# EAGLE board communication board (EAGLE 7.5.0)
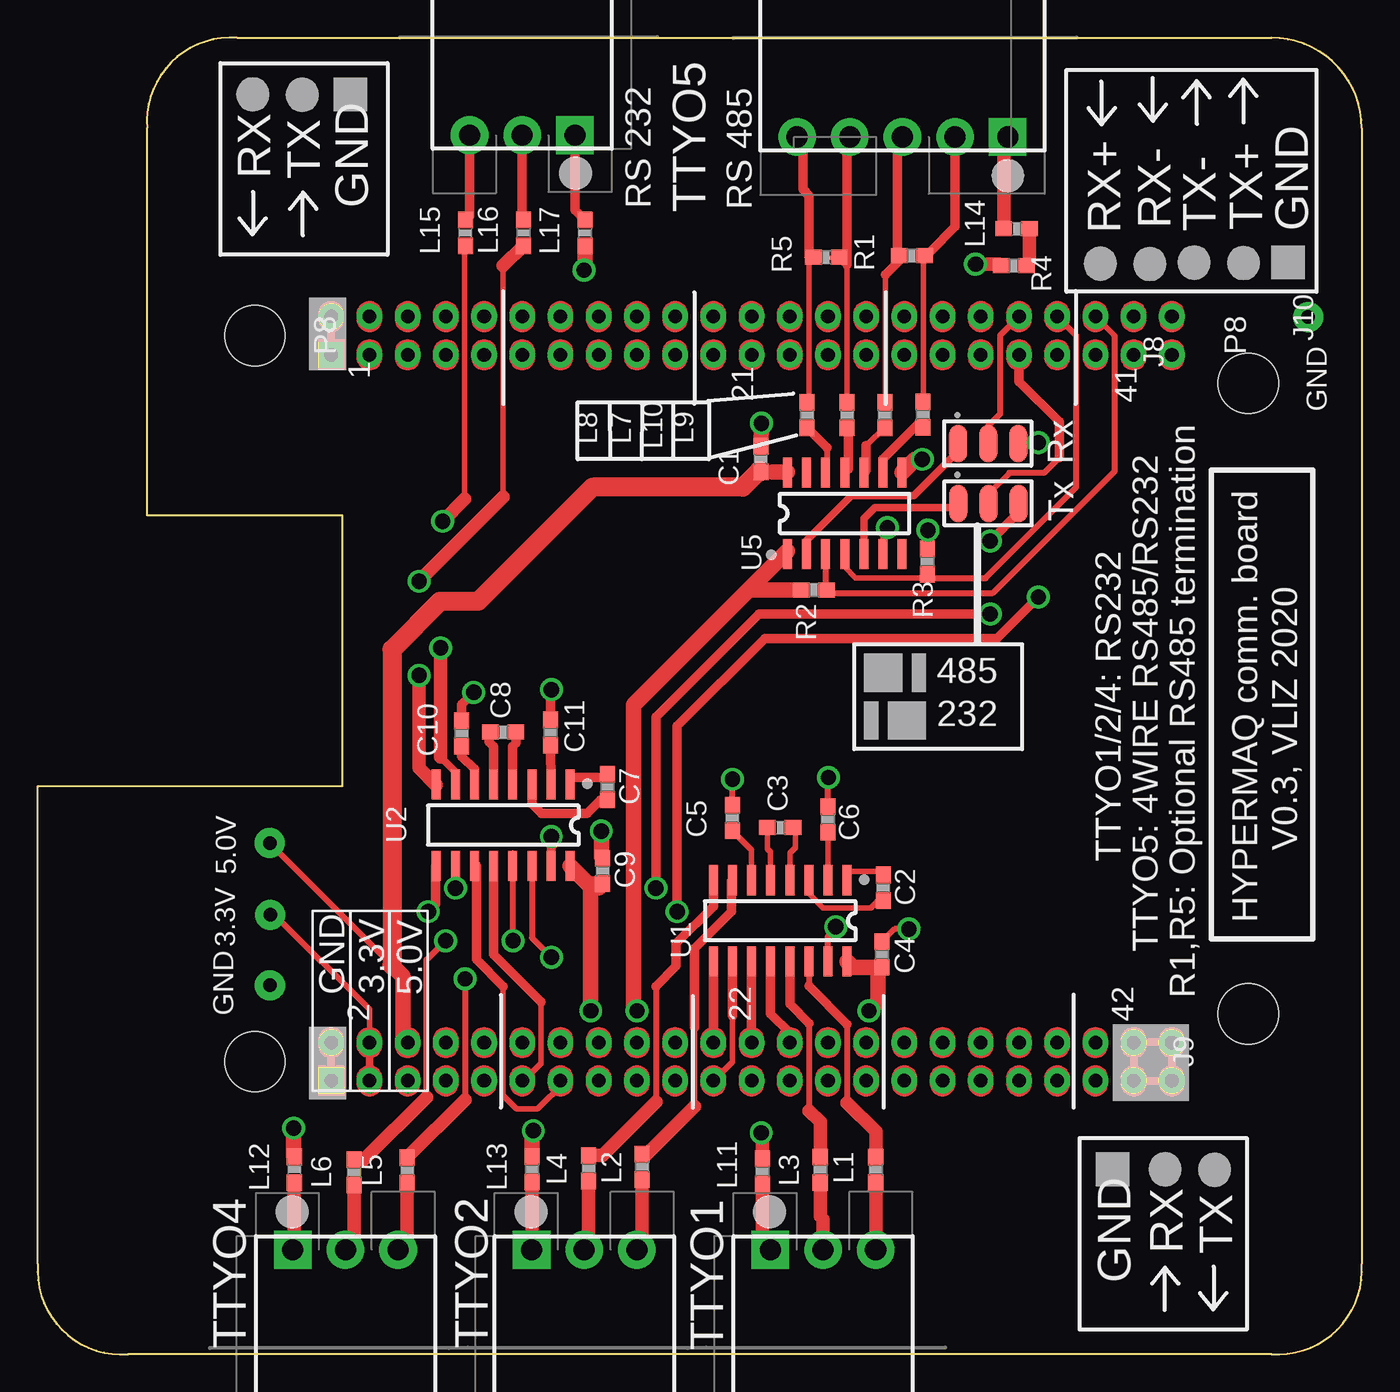
[diagram p0: board, top side]
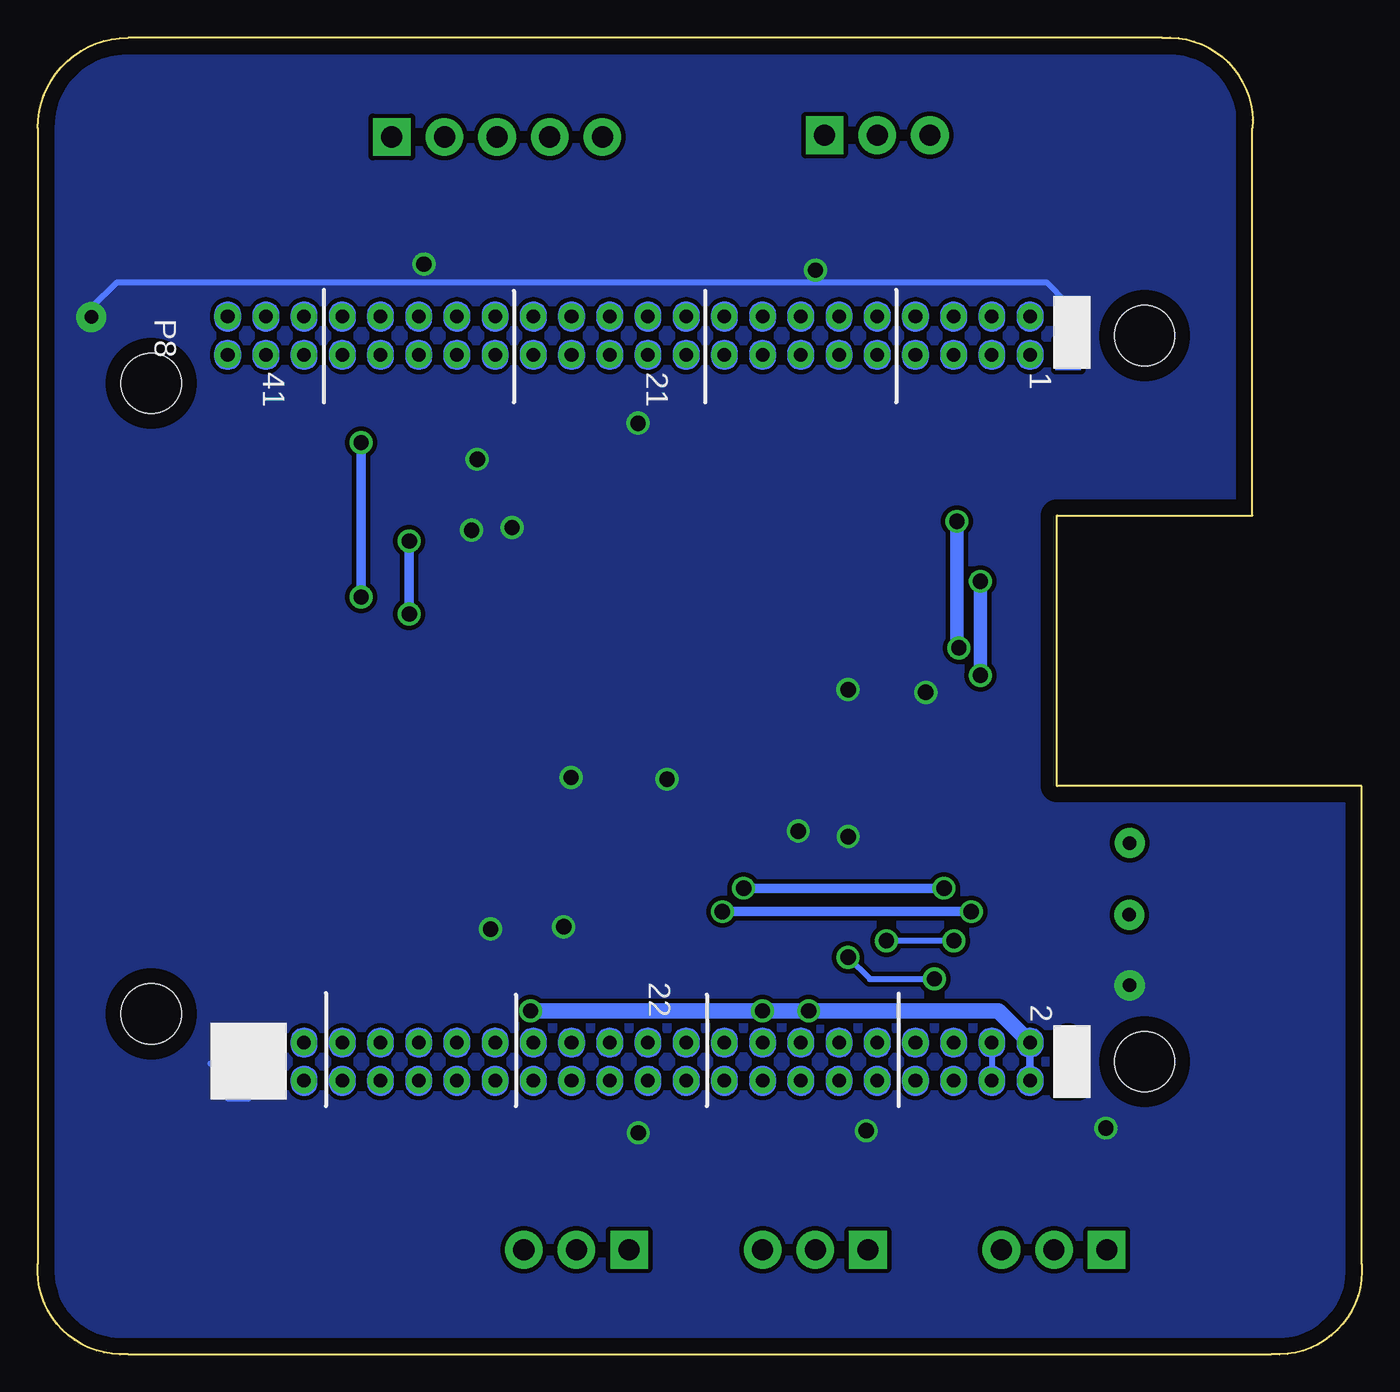
[diagram p1: board, bottom side, seen from below]

Size 88.03 x 87.53 mm. Coordinates in mm from the lower left corner, seen from the top.
Outline: 13.27,87.52 arc99 7.27,81.52 7.27,55.77 20.27,55.77 20.27,37.77 0.02,37.77 0.02,6.02 arc100 6.02,0.02 82.02,0.02 arc99 88.02,6.02 88.02,81.52 arc90 82.02,87.52 13.27,87.52
Copper layers (1*16): Top 0.035mm / dielectric 1.5mm / Bottom 0.035mm
Design rules "default *": minimum track width 10mil, minimum drill 0.61mm, track to track 8mil, track to pad 8mil, pad to pad 8mil, via to via 8mil, smd to smd 8mil, copper to edge 40mil, drill to drill 8mil, minimum pad ring 0mil, minimum via ring 8mil, stop-mask expansion 4mil, vias tented up to drill 40mil, thermal gap 10mil
Net classes: 0 Default: width 0.4 mm, clearance 0.254 mm, clearance 0.254 mm to class 1; 1 Signals: width 0.4 mm, clearance 0.254 mm, clearance 0.254 mm to class 0
Holes 4 mm at 14.44,67.72 80.48,64.54 80.48,22.63 14.44,19.46
bRestrict: 8 lines

## Footprints (pad centres in the part's own frame; a part is rotated, then mirrored left to right if it is on the bottom)
0603 = smd 1.1 x 1: 1 -0.85,0; 2 0.85,0
0603_C3 = smd 1.1 x 1: 1 -0.85,0; 2 0.85,0
Solder_spot/pin_header_small_no_marking = drill 0.9 pad 2: 1 0.007,-0.017
Weidmuller_SL_3.5/5/90G_ORANGE_5P = drill 1.4 pad 2.5 square: 1 7,0 | drill 1.4 pad 2.5: 2 3.5,0; 3 0,0; 4 -3.5,0; 5 -7,0
Weidmuller_SL_3.5/3/90G_ORANGE_3P = drill 1.4 pad 2.5 square: 1 3.5,0 | drill 1.4 pad 2.5: 2 0,0; 3 -3.5,0
BBB_P8_Samtec_ESQ-123-14-G-D = drill 0.9 pad 1.7 square: 1 0,0 | drill 0.9 pad 1.7: 2 0,2.54; 3 2.54,0; 4 2.54,2.54; 5 5.08,0; 6 5.08,2.54; 7 7.62,0; 8 7.62,2.54; 9 10.16,0; 10 10.16,2.54; 11 12.7,0; 12 12.7,2.54; 13 15.24,0; 14 15.24,2.54; 15 17.78,0; 16 17.78,2.54; 17 20.32,0; 18 20.32,2.54; 19 22.86,0; 20 22.86,2.54; 21 25.4,0; 22 25.4,2.54; 23 27.94,0; 24 27.94,2.54; 25 30.48,0; 26 30.48,2.54; 27 33.02,0; 28 33.02,2.54; 29 35.56,0; 30 35.56,2.54; 31 38.1,0; 32 38.1,2.54; 33 40.64,0; 34 40.64,2.54; 35 43.18,0; 36 43.18,2.54; 37 45.72,0; 38 45.72,2.54; 39 48.26,0; 40 48.26,2.54; 41 50.8,0; 42 50.8,2.54; 43 53.34,0; 44 53.34,2.54; 45 55.88,0; 46 55.88,2.54
BBB_P9_Samtec_ESQ-123-14-G-D = drill 0.9 pad 1.7 square: 101 0,0 | drill 0.9 pad 1.7: 102 0,2.54; 103 2.54,0; 104 2.54,2.54; 105 5.08,0; 106 5.08,2.54; 107 7.62,0; 108 7.62,2.54; 109 10.16,0; 110 10.16,2.54; 111 12.7,0; 112 12.7,2.54; 113 15.24,0; 114 15.24,2.54; 115 17.78,0; 116 17.78,2.54; 117 20.32,0; 118 20.32,2.54; 119 22.86,0; 120 22.86,2.54; 121 25.4,0; 122 25.4,2.54; 123 27.94,0; 124 27.94,2.54; 125 30.48,0; 126 30.48,2.54; 127 33.02,0; 128 33.02,2.54; 129 35.56,0; 130 35.56,2.54; 131 38.1,0; 132 38.1,2.54; 133 40.64,0; 134 40.64,2.54; 135 43.18,0; 136 43.18,2.54; 137 45.72,0; 138 45.72,2.54; 139 48.26,0; 140 48.26,2.54; 141 50.8,0; 142 50.8,2.54; 143 53.34,0; 144 53.34,2.54; 145 55.88,0; 146 55.88,2.54
SOIC-16/150mil = smd 2 x 0.6: 1 -2.7,4.445; 2 -2.7,3.175; 3 -2.7,1.905; 4 -2.7,0.635; 5 -2.7,-0.635; 6 -2.7,-1.905; 7 -2.7,-3.175; 8 -2.7,-4.445; 9 2.7,-4.445; 10 2.7,-3.175; 11 2.7,-1.905; 12 2.7,-0.635; 13 2.7,0.635; 14 2.7,1.905; 15 2.7,3.175; 16 2.7,4.445
Solder_Jumper_3P = smd 1.2 x 2.5: 1 -2,0; 2 0,0; 3 2,0
SOIC-14/150mil = smd 2 x 0.6: 1 -2.7,3.81; 2 -2.7,2.54; 3 -2.7,1.27; 4 -2.7,0; 5 -2.7,-1.27; 6 -2.7,-2.54; 7 -2.7,-3.81; 8 2.7,-3.81; 9 2.7,-2.54; 10 2.7,-1.27; 11 2.7,0; 12 2.7,1.27; 13 2.7,2.54; 14 2.7,3.81

## Placement (x,y rotation side)
C1  220nF_25V_10%  [0603]  48.08,59.51 90 top
C2  220nF_25V_10%  [0603]  56.22,31.02 90 top
C3  220nF_25V_10%  [0603_C3]  49.36,35.02 180 top
C4  220nF_25V_10%  [0603]  56.13,26.58 270 top
C5  220nF_25V_10%  [0603]  46.19,35.65 90 top
C6  220nF_25V_10%  [0603]  52.54,35.56 90 top
C7  220nF_25V_10%  [0603]  37.89,37.72 90 top
C8  220nF_25V_10%  [0603_C3]  30.95,41.37 180 top
C9  220nF_25V_10%  [0603]  37.57,32.13 270 top
C10  220nF_25V_10%  [0603]  28.2,41.28 90 top
C11  220nF_25V_10%  [0603]  34.1,41.34 90 top
J1  GND  [Solder_spot/pin_header_small_no_marking]  15.45,24.52 180 top
J2  3.3V  [Solder_spot/pin_header_small_no_marking]  15.48,29.21 180 top
J3  1x5 Horizontal  [Weidmuller_SL_3.5/5/90G_ORANGE_5P]  57.49,80.93 0 top
J4  1x3 Horizontal  [Weidmuller_SL_3.5/3/90G_ORANGE_3P]  52.21,6.95 180 top
J5  1x3 Horizontal  [Weidmuller_SL_3.5/3/90G_ORANGE_3P]  36.34,6.95 180 top
J6  1x3 Horizontal  [Weidmuller_SL_3.5/3/90G_ORANGE_3P]  20.46,6.95 180 top
J7  5.0V  [Solder_spot/pin_header_small_no_marking]  15.45,33.97 180 top
J8  2x23  [BBB_P8_Samtec_ESQ-123-14-G-D]  19.52,66.45 0 top
J9  BBB P9 SAMTEC ESQ-123-14-G-D  [BBB_P9_Samtec_ESQ-123-14-G-D]  19.52,18.19 0 top
J10  GND  [Solder_spot/pin_header_small_no_marking]  84.47,68.96 270 top
J11  1x3 Horizontal  [Weidmuller_SL_3.5/3/90G_ORANGE_3P]  32.21,81.04 0 top
L1  BLM18HE152SN1  [0603]  55.71,12.26 270 top
L2  BLM18HE152SN1  [0603]  40.18,12.46 270 top
L3  BLM18HE152SN1  [0603]  52.03,12.26 270 top
L4  BLM18HE152SN1  [0603]  36.63,12.37 270 top
L5  BLM18HE152SN1  [0603]  24.57,12.23 270 top
L6  BLM18HE152SN1  [0603]  21.04,12.1 270 top
L7  BLM18HE152SN1  [0603]  53.81,62.43 270 top
L8  BLM18HE152SN1  [0603]  51.15,62.45 270 top
L9  BLM18HE152SN1  [0603]  58.85,62.48 270 top
L10  BLM18HE152SN1  [0603]  56.31,62.44 270 top
L11  BLM18HE152SN1  [0603]  48.17,12.16 270 top
L12  BLM18HE152SN1  [0603]  17.07,12.28 270 top
L13  BLM18HE152SN1  [0603]  32.87,12.3 270 top
L14  BLM18HE152SN1  [0603_C3]  65.08,74.83 180 top
L15  BLM18HE152SN1  [0603]  28.44,74.55 90 top
L16  BLM18HE152SN1  [0603]  32.3,74.55 90 top
L17  BLM18HE152SN1  [0603]  36.39,74.55 90 top
R1  220R_1%  [0603_C3]  58.12,73.04 0 top
R2  220R_1%  [0603_C3]  51.6,50.82 180 top
R3  220R_1%  [0603]  59.15,52.71 270 top
R4  220R_1%  [0603_C3]  64.9,72.37 0 top
R5  220R_1%  [0603_C3]  52.43,72.93 0 top
U1  RS232  [SOIC-16/150mil]  49.36,28.82 270 top
U2  RS232  [SOIC-16/150mil]  30.95,35.17 270 top
U3  SOLDER JUMPER 3P  [Solder_Jumper_3P]  63.21,56.57 0 top
U4  SOLDER JUMPER 3P  [Solder_Jumper_3P]  63.19,60.54 0 top
U5  RS485-full  [SOIC-14/150mil]  53.66,55.91 90 top

## Library data of the parts
C1-C11 = common; DATASHEET: http://www.farnell.com/datasheets/2237835.pdf?_ga=2.187273448.1155250314.1583488454-694108187.1583488454; DIELECTRIC: X7R; FARNELL: 1833865; MANUFACTURER: AVX; MANUFACTURER NAME: 06033C224KAT2A; VOLTAGE RATING: 25V
J1 J2 J7 J10 = common
J3 = common; DATASHEET: http://www.farnell.com/datasheets/2635298.pdf?_ga=2.62475244.1141463315.1583506533-554215631.1583506533; FARNELL: 1121795; MANUFACTURER: Weidmuller; MANUFACTURER NAME: SL 3.5/5/90G; MATING CONNECTOR: BL 3.5/5; MAX WIRE AREA: mm2; MISC: 3.5mm pitch; RATED CURRENT: 10A
J4-J6 J11 = common; DATASHEET: http://www.farnell.com/datasheets/2635295.pdf?_ga=2.223618012.698917893.1583506458-1641402904.1583506458; FARNELL: 1121791; MANUFACTURER: Weidmuller; MANUFACTURER NAME: SL 3.5/3/90G; MATING CONNECTOR: BL 3.5/3; MAX WIRE AREA: mm2; MISC: 3.5mm pitch; RATED CURRENT: 10A
J8 = common; DATASHEET: http://www.farnell.com/datasheets/1992053.pdf?_ga=2.117281670.1890156802.1583503291-1500529979.1583503291; FARNELL: 2667408; MANUFACTURER: Samtec; MANUFACTURER NAME: ESQ-123-14-G-D; MAX WIRE AREA: mm2; RATED CURRENT: 5.2A
J9 = common; FARNELL: 2667408; MANUFACTURER: Samtec; MANUFACTURER NAME: ESQ-123-14-G-D; MAX WIRE AREA: mm2; RATED CURRENT: 5.2A
L1-L17 = common; DATASHEET: http://www.farnell.com/datasheets/1851896.pdf#page=2&zoom=200,-59,577; FARNELL: 2443237; MANUFACTURER: Murata; MANUFACTURER NAME: BLM18HE152SN1D
R1-R5 = common; DATASHEET: http://www.farnell.com/datasheets/2860681.pdf?_ga=2.219834526.640377260.1583748418-119970839.1583748418; FARNELL: 2447298; MANUFACTURER: Multicomp; MANUFACTURER NAME: MCWR06X2200FTL; POWER RATING: 100mW; RESISTANCE TOLERANCE: 1%; VOLTAGE RATING: 75%
U1 U2 = common; DATASHEET: http://datasheets.diptrace.com/maxim/MAX3222-MAX3241.pdf; DRIVERS/RECEIVERS: 2/2; FARNELL: 2519459; MANUFACTURER: Maxim Integrated Products; MANUFACTURER NAME: MAX3232ESE+; MAX DATA RATE: 1Mbps; SUPPLY VOLTAGE: 3V3 or 5V
U3 U4 = common; MAX WIRE AREA: mm2; RATED CURRENT: A
U5 = common; DATASHEET: http://datasheets.diptrace.com/maxim/MAX13430E-MAX13433E.pdf; DRIVERS/RECEIVERS: 1/1; FARNELL: 2511596; MANUFACTURER: Maxim Integrated Products; MANUFACTURER NAME: MAX13433EESD+; MAX DATA RATE: 500kbps; MISC: 1/8 unit load; SUPPLY VOLTAGE: 3V - 5V

## Nets
3.3V: C4.2 C9.2 J2.1 J9.103 J9.104 R2.2 U1.16 U2.16 U5.1
5.0v: C1.1 J7.1 J9.105 J9.106 U5.14
GND: C1.2 C4.1 C5.2 C6.2 C9.1 C10.2 C11.2 J1.1 J8.1 J8.2 J9.101 J9.102 J9.143 J9.144 J9.145 J9.146 J10.1 L11.1 L12.1 L13.1 L17.1 R3.1 R4.1 U1.15 U2.15 U5.6 U5.8
Net_0: L8.2 U5.12
Net_1: L4.1 U1.8
Net_2: J3.1 L14.2
Net_3: L14.1 R4.2
Net_5: L9.2 U5.9
Net_6: L10.2 U5.10
Net_9: C6.1 U1.2
Net_10: C5.1 U1.6
Net_11: C2.2 U1.1
Net_12: C2.1 U1.3
Net_13: C3.1 U1.4
Net_14: C3.2 U1.5
Net_15: C11.1 U2.2
Net_16: C10.1 U2.6
Net_17: C7.2 U2.1
Net_18: C7.1 U2.3
Net_19: C8.1 U2.4
Net_20: C8.2 U2.5
Net_21: L3.1 U1.13
Net_22: L2.1 U1.7
Net_23: L1.1 U1.14
Net_40: L6.1 U2.13
Net_41: L5.1 U2.14
Net_47: J4.1 L11.2
Net_48: J6.1 L12.2
Net_49: J5.1 L13.2
Net_60: L15.1 U2.7
Net_61: L16.1 U2.8
Net_62: J11.1 L17.2
Net_63: L7.2 U5.11
RS485_DE: J8.42 R2.1 U5.3
RS485_RE: J8.40 R3.2 U5.4
SER1_RX: J4.2 L3.2
SER1_TX: J4.3 L1.2
SER2_RX: J5.2 L4.2
SER2_TX: J5.3 L2.2
SER4_RX: J6.2 L6.2
SER4_TX: J6.3 L5.2
SER5_Rx+: J3.5 L8.1 R5.1
SER5_Rx-: J3.4 L7.1 R5.2
SER5_RX_232: J11.2 L16.2
SER5_Tx+: J3.2 L9.1 R1.2
SER5_Tx-: J3.3 L10.1 R1.1
SER5_TX_232: J11.3 L15.2
UART1_RX: J9.126 U1.12
UART1_TX: J9.124 U1.11
UART2_RX: J9.122 U1.9
UART2_TX: J9.121 U1.10
UART4_RX: J9.111 U2.12
UART4_TX: J9.113 U2.11
UART5_RX: J8.38 U4.2
UART5_RX_232: U2.9 U4.3
UART5_RX_485: U4.1 U5.2
UART5_TX: J8.37 U3.2
UART5_TX_232: U2.10 U3.3
UART5_TX_485: U3.1 U5.5

## Tracks (layer width: path | path; a pad name or v marks a point on that pad's centre or on a via)
3.3V  (via drill 1.02 pad 1.52)
  Top 0.381: J2.1 15.76,29.22 22.06,22.93 J9.104
  Top 0.4: 39.61,22.84 v39.85,22.84 | U5.1 49.85,53.4
  Top 0.508: J9.103 J9.104
  Top 1.016: v55.26,22.84 55.87,23.44 55.87,25.47 C4.2 54.2,25.73 U1.16 | v36.77,22.84 36.77,31.28 C9.2 37.3,31.01 36.86,31.01 U2.16 | R2.2 47.26,50.82 | 47.26,50.82 39.61,43.17 39.61,22.84 | 49.85,53.4 47.26,50.82
  Bottom 0.508: J9.104 J9.103
  Bottom 1.016: v55.26,22.84 v39.85,22.84 v36.77,22.84 24.17,22.84 J9.104
5.0v
  Top 0.4: 23.56,25.87 J7.1 | U5.14 49.85,58.66 | 48.86,58.66 C1.1
  Top 1.016: J9.106 24.31,20.73 24.31,25.12 23.56,25.87 | 49.85,58.66 48.86,58.66
  Top 1.27: C1.1 47.99,58.75 46.88,57.64 36.88,57.64 29.28,50.05 26.74,50.05 23.56,46.87 23.56,25.87
  Bottom 0.4: J9.106 J9.105
GND  (via drill 1.02 pad 1.52)
  Top 0.4: C5.2 v46.19,38.24 | 32.87,14.79 v32.95,14.87 | C6.2 52.54,38.32 v52.57,38.35 | v58.81,59.5 58.36,59.5 | 56.49,54.73 56.2,54.44 U5.6 | U1.15 52.54,27.78 53.06,28.3 v53.06,28.43 | v59.18,54.79 59.18,53.56 R3.1 | v57.93,28.27 56.97,28.27 C4.1
  Top 0.508: J8.2 J8.1 | J9.101 J9.102 | J9.146 J9.144 J9.143 J9.145 | J9.146 | J9.145 J9.146 | J9.145
  Top 0.6: 34.15,33.85 34.12,33.85 U2.15
  Top 0.635: C10.2 28.2,43.22 v28.99,44.01 | C11.2 34.1,44.13 v34.16,44.19 | v56.49,54.97 56.49,54.73
  Top 0.762: v34.15,34.42 34.15,33.85
  Top 0.889: L11.1 48.18,14.65 v48.1,14.73 | v62.36,72.47 63.95,72.47 R4.1
  Top 1: 17.03,13.15 17.05,13.15 L12.1
  Top 1.016: C1.2 v48.12,61.9 | C9.1 37.47,33.07 v37.47,34.78 | L13.1 32.87,14.79 | 58.36,59.5 U5.8 | L17.1 36.39,72.14 v36.33,72.08 | v17.03,15.04 17.03,13.15
  Bottom 0.4: J10.1 84.46,69.57 82.75,71.27 20.95,71.27 19.66,69.99 19.66,68.84 J8.2 | J9.143 74.03,17.02 75.4,17.02 J9.145 76.54,19.33 76.26,19.33 76.26,20.73 J9.146 75.4,21.58 74.21,21.58 73.36,20.73 J9.144
  Bottom 0.508: J9.145 J9.146 | J9.146 J9.144 J9.143 J9.145 | J9.146 | J9.145 | J9.102 J9.101
  Bottom 1.016: J8.2 J8.1
  pour Bottom (no thermals): 71.7,23.31 76.84,23.31 76.84,14.51 71.7,14.51
  pour Bottom (no thermals): 17.92,22.28 20.68,22.28 20.68,15.86 17.92,15.86
  pour Bottom (isolate 0.3): 8.59,81.51 8.6,82.35 8.73,83.08 8.98,83.76 9.35,84.4 9.83,84.96 10.39,85.43 11.02,85.8 11.71,86.06 12.44,86.19 13.28,86.2 81.97,86.2 82.76,86.14 83.47,85.97 84.15,85.69 84.78,85.31 85.33,84.83 85.81,84.28 86.19,83.65 86.47,82.97 86.64,82.26 86.7,81.47 86.7,6.03 86.69,5.19 86.56,4.46 86.3,3.77 85.93,3.14 85.46,2.58 84.9,2.1 84.26,1.73 83.58,1.48 82.85,1.35 82.01,1.34 6.02,1.34 5.17,1.34 4.45,1.47 3.76,1.72 3.12,2.09 2.56,2.56 2.09,3.12 1.72,3.76 1.47,4.45 1.34,5.17 1.34,6.02 1.34,36.45 20.3,36.45 20.78,36.55 21.21,36.83 21.49,37.26 21.59,37.74 21.59,55.8 21.49,56.28 21.21,56.71 20.78,56.99 20.3,57.09 8.59,57.09
Net_0
  Top 0.4: 52.48,60.27 52.48,58.7 U5.12
  Top 0.635: L8.2 52.48,60.27
Net_1
  Top 0.4: 41.1,24.46 41.1,16.78
  Top 0.635: U1.8 44.92,29.77 42.46,27.31 42.46,25.81 41.1,24.46
  Top 0.889: 41.1,16.78 37.55,13.23 L4.1
Net_2
  Top 0.889: L14.2 64.23,80.67 J3.1
Net_3
  Top 0.889: R4.2 65.75,72.5 65.93,72.67 L14.1
Net_5
  Top 0.4: U5.9 56.2,59.53 | 58.56,61.89 58.85,61.89 L9.2
  Top 0.635: 56.2,59.53 58.56,61.89
Net_6
  Top 0.4: L10.2 56.31,61.64 55.07,60.4 | 55.07,58.75 U5.10
  Top 0.635: 55.07,60.4 55.07,58.75
Net_9
  Top 0.381: C6.1 U1.2
Net_10
  Top 0.381: U1.6 47.46,33.53 C5.1
Net_11
  Top 0.381: U1.1 53.81,32.1 56.22,32.1 C2.2
Net_12
  Top 0.381: U1.3 51.27,30.63 52.21,29.69 55.41,29.69 55.87,30.14 56.22,30.14 C2.1
Net_13
  Top 0.381: U1.4 50,33.34 50.37,33.71 50.37,34.86 C3.1
Net_14
  Top 0.381: U1.5 48.73,33.39 48.51,33.61 C3.2
Net_15
  Top 0.635: C11.1 U2.2
Net_16
  Top 0.635: U2.6 29.04,38.91 28.2,39.76 C10.1
Net_17
  Top 0.635: U2.1 35.39,38.36 37.89,38.36 C7.2
Net_18
  Top 0.635: U2.3 32.85,36.6 33.49,35.97 36.52,35.97 37.42,36.87 C7.1
Net_19
  Top 0.635: C8.1 31.8,40.63 31.58,40.41 U2.4
Net_20
  Top 0.635: U2.5 30.31,40.41 30.02,40.71 30.02,41.37 C8.2
Net_21
  Top 0.4: 51.28,22.01 51.28,16.2
  Top 0.635: U1.13 50,23.29 51.28,22.01
  Top 0.889: 51.28,16.2 52.03,15.45 L3.1
Net_22
  Top 0.381: 43.66,16.49 43.66,21.73
  Top 0.4: L2.1 40.48,13.31 | 46.12,31.46 U1.7
  Top 0.635: 43.66,21.73 43.66,26.97 46.12,29.43 46.12,31.46
  Top 0.889: 40.48,13.31 43.66,16.49
Net_23
  Top 0.4: U1.14 51.27,24.48 | 53.81,21.94 53.81,16.73
  Top 0.635: 51.27,24.48 53.81,21.94
  Top 0.889: 53.81,16.73 55.71,14.83 L1.1
Net_40  (via drill 1.02 pad 1.52)
  Top 0.4: L6.1 21.71,12.95 | 25.86,17.09 25.86,26.23 v27.13,27.5 | v31.6,27.5 31.6,33.29 31.58,33.31 U2.13
  Top 0.889: 21.71,12.95 25.86,17.09
  Bottom 0.4: v27.13,27.5 v31.6,27.5
Net_41  (via drill 1.02 pad 1.52)
  Top 0.4: U2.14 32.85,27.69 v34.15,26.4 | v28.42,24.95 28.42,16.93
  Top 0.889: 28.42,16.93 L5.1
  Bottom 0.4: v34.15,26.4 32.71,24.95 v28.42,24.95
Net_47
  Top 0.3: 48.18,7.49 J4.1
  Top 0.889: L11.2 48.18,7.49
Net_48
  Top 0.3: 17.07,7.06 J6.1
  Top 0.889: L12.2 17.07,7.06
Net_49
  Top 0.3: 32.87,6.98 J5.1
  Top 0.889: L13.2 32.87,6.98
Net_60  (via drill 1.02 pad 1.52)
  Top 0.381: 28.4,56.86 28.4,73.7 L15.1
  Top 0.508: U2.7 27.77,38.71 26.79,39.7
  Top 0.889: 26.79,39.7 v26.79,46.97 | v26.92,55.38 28.4,56.86
  Bottom 0.889: v26.79,46.97 26.92,46.84 v26.92,55.38
Net_61  (via drill 1.02 pad 1.52)
  Top 0.381: 30.95,72.37 30.95,56.98
  Top 0.889: L16.1 32.3,73.72 30.95,72.37 | 30.95,56.98 v25.36,51.39 | v25.36,45.14 25.36,38.97 26.5,37.83 U2.8
  Bottom 0.889: v25.36,51.39 v25.36,45.14
Net_62
  Top 0.635: J11.1 35.71,76.08 L17.2
Net_63
  Top 0.4: L7.2 53.81,61.53 53.9,61.43 | 53.9,58.86 U5.11
  Top 0.635: 53.9,61.43 53.9,58.86
RS485_DE
  Top 0.4: U5.3 52.39,50.89 R2.1 52.51,50.82 52.71,50.62 63.51,50.62 71.6,58.71 71.6,67.71 J8.42
RS485_RE
  Top 0.381: R3.2 59.15,51.6 54.38,51.6 53.66,52.32 U5.4
  Top 0.4: R3.2 59.15,51.6 63.01,51.6 69.04,57.64 69.04,67.72 J8.40
SER1_RX
  Top 0.889: L3.2 52.03,9.18 52.21,8.99 J4.2
SER1_TX
  Top 0.889: L1.2 J4.3
SER2_RX
  Top 0.381: 36.63,7.25 J5.2
  Top 0.889: L4.2 36.63,7.25
SER2_TX
  Top 0.381: 40.18,7.3 J5.3
  Top 0.889: L2.2 40.18,7.3
SER4_RX
  Top 0.381: 21.04,6.95 J6.2
  Top 0.889: L6.2 21.04,6.95
SER4_TX
  Top 0.381: 24.57,6.95 J6.3
  Top 0.889: L5.2 24.57,6.95
SER5_Rx+
  Top 0.381: 51.28,72.93 51.28,63.43
  Top 0.4: J3.5 50.88,80.93 | 51.28,63.43 L8.1 | R5.1 51.28,72.93
  Top 0.635: 50.88,80.93 50.88,77.44 51.28,77.04 51.28,72.93
SER5_Rx-
  Top 0.381: 53.81,72.43 L7.1
  Top 0.4: J3.4 53.81,80.93 | R5.2 52.84,72.88 53.81,72.43
  Top 0.635: 53.81,80.93 53.81,72.43
SER5_RX_232
  Top 0.635: L16.2 32.21,75.49 J11.2
SER5_Tx+
  Top 0.381: 58.89,72.86 58.89,63.36
  Top 0.4: 58.89,72.86 59.3,73.27 R1.2 | 58.89,63.36 L9.1
  Top 0.635: J3.2 60.99,74.95 59.3,73.27
SER5_Tx-
  Top 0.381: 56.35,71.76 56.35,63.29
  Top 0.4: J3.3 57.16,80.93 | 57.52,72.92 57.16,72.92 R1.1 | 56.35,63.29 L10.1
  Top 0.635: 57.16,80.93 57.16,72.92 | 57.52,72.92 56.35,71.76
SER5_TX_232
  Top 0.635: L15.2 28.71,75.67 J11.3
UART1_RX
  Top 0.381: J9.126 50,21.36
  Top 0.635: 50,21.36 48.73,22.63 U1.12
UART1_TX
  Top 0.635: J9.124 U1.11
UART2_RX
  Top 0.635: J9.122 U1.9
UART2_TX
  Top 0.381: J9.121 46.19,19.46 46.19,22.49
  Top 0.635: 46.19,22.49 U1.10
UART4_RX
  Top 0.381: J9.111 32.14,18.27 32.41,18.27 33.47,19.33 33.47,23.42
  Top 0.635: 33.47,23.42 30.31,26.58 U2.12
UART4_TX
  Top 0.381: J9.113 34.49,18.46 34.49,18.06 35,18.06 33.25,16.31 31.85,16.31 30.96,17.2 30.96,24.47
  Top 0.635: 30.96,24.47 29.19,26.24 29.19,32.47 U2.11
UART5_RX
  Top 0.4: J8.38 63.98,67.73 63.98,62.51 63.19,61.73 U4.2
UART5_RX_232  (via drill 1.02 pad 1.52)
  Top 0.635: U2.9 26.46,32.47 26.46,29.92 v25.97,29.43 | v42.51,29.43 42.51,41.76 48.35,47.59 63.77,47.59 v66.52,50.34 | v66.52,60.61 65.19,60.61 U4.3
  Bottom 0.635: v25.97,29.43 v42.51,29.43 | v66.52,50.34 v66.52,60.61
UART5_RX_485
  Top 0.508: U4.1 61.19,60.02 58.26,57.09 54.1,57.09 51.12,54.1 U5.2
UART5_TX
  Top 0.4: 67.92,59.63 66.88,58.59 64.58,58.59 63.3,57.31 63.3,56.66 U3.2
  Top 0.635: J8.37 65.24,64.67 67.92,61.99 67.92,59.63
UART5_TX_232  (via drill 1.02 pad 1.52)
  Top 0.635: U2.10 v27.77,30.99 | v41.1,30.99 41.1,42.37 47.94,49.21 v63.33,49.21 | v63.33,54.07 65.21,55.95 U3.3
  Bottom 0.635: v27.77,30.99 v41.1,30.99 | v63.33,49.21 v63.33,54.07
UART5_TX_485
  Top 0.508: U3.1 61.21,56.3 55.66,56.3 54.93,55.56 U5.5

## Text on the board
tPlace: RX | TX | GND | RS 232 | RS 485 | TTYO5 | RX+ | RX- | TX- | TX+ | GND | Rx | Tx | 485 | 232 | V0.3, VLIZ 2020 | TTYO1/2/4: RS232 | HYPERMAQ comm. board | TTYO5: 4WIRE RS485/RS232 | 3.3V | GND | 5.0V | R1,R5: Optional RS485 termination | RX | TX | GND | TTYO4 | TTYO2 | TTYO1